# Altium PCB STM_System_Board.PCBDOC (part 12 of 16)
Units mm, origin at the board's own origin, x right, y up, seen from the top; angles counter-clockwise.
Board outline 222.53 x 100.01 mm, 6 copper layers (Top Layer, Int1 (GND), Int2 (Sign), Layer 1, Layer 2, Bottom Layer), stack 1.526 mm thick; 702 components, 774 nets, 3596 pads, 1988 vias.
Unrouted connection lines stored in the file: 1.
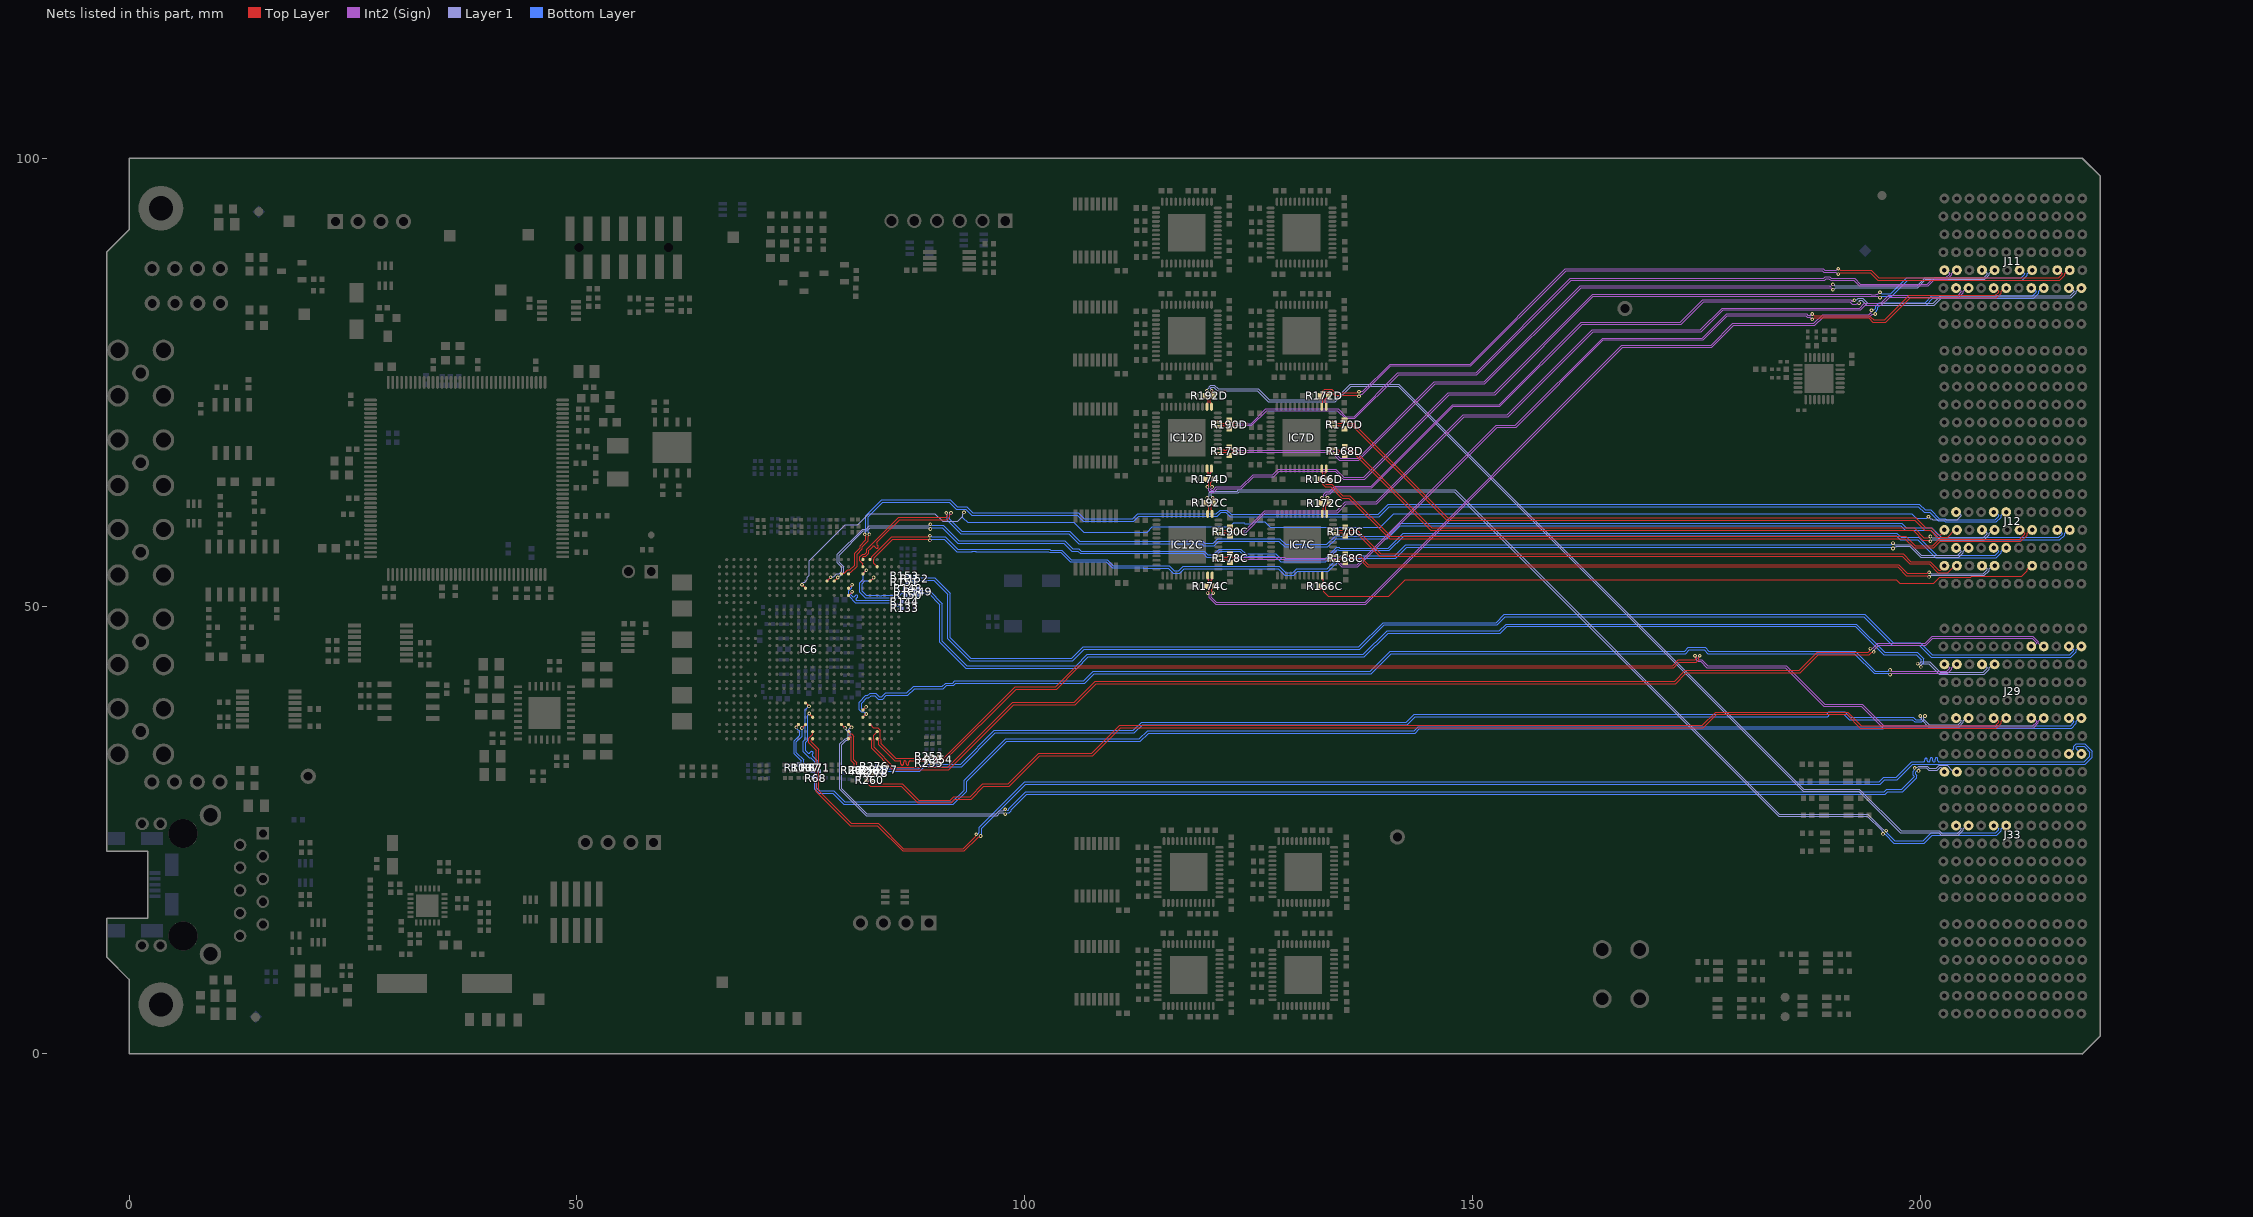
[diagram p15: the nets of this part, all layers, seen from the top]

## Via types
v1: diameter 0.4, hole 0.2, Top Layer to Bottom Layer, tented both sides, 1806 vias
v2: diameter 0.7, hole 0.4, Top Layer to Bottom Layer, tented both sides, 92 vias
v3: diameter 0.7, hole 0.4, Top Layer to Bottom Layer, 90 vias

## Nets (pads, with @x,y where several pads share a name; then routed paths per layer and width w, separated by ;. In a path a pad name is that pad's centre, name@x,y a point inside that pad or via, vN(x,y) a via of type N, cw(c..) or ccw(c..) an arc to the next point about the centre after c; other vN are vias at no path point) (continued)
SLOT3.LVDS_8_P: IC7C.47 J12.E2 R166C.1 | length 83.3
  Top Layer w0.095: IC7C.47@133.194,53.396 133.194,53.055 133.311,52.938 133.311,52.658 133.335,52.634 133.335,52.499 133.279,52.444 133.241,52.444 132.998,52.201 R166C.1@132.998,52.181 132.998,52.161 133.241,51.919 133.279,51.919 133.335,51.863 133.335,51.618 133.844,51.108 140.611,51.108 142.452,52.95 197.273,52.95 197.676,52.547 201.432,52.547 202.111,53.225 205.602,53.225 205.711,53.333 211.284,53.333 211.872,53.921 211.872,54.111 212.252,54.49 J12.E2@212.439,54.49
SLOT3.LVDS_9_N: IC7C.4 J12.I2 R168C.2 | length 75.3
  Top Layer w0.095: IC7C.4@134.394,55.596 134.735,55.596 134.852,55.48 135.091,55.48 135.095,55.484 135.428,55.484 135.483,55.54 135.483,55.578 135.726,55.821 R168C.2@135.746,55.821 135.766,55.821 136.008,55.578 136.008,55.54 136.064,55.484 137.476,55.484 138.336,54.625 197.525,54.625 198.499,53.651 200.73,53.651 200.861,53.782 v1(200.939,53.782)
  Layer 1 w0.102: v1(200.939,53.782) 200.991,53.782 201.147,53.625 207.003,53.625 207.432,54.054 207.432,54.138 207.08,54.49 J12.I2@206.839,54.49
SLOT3.LVDS_9_P: IC7C.3 J12.H2 R168C.1 | length 75.6
  Top Layer w0.095: IC7C.3@134.394,55.096 134.735,55.096 134.852,55.213 135.201,55.213 135.206,55.217 135.428,55.217 135.483,55.162 135.483,55.123 135.726,54.881 R168C.1@135.746,54.881 135.766,54.881 136.008,55.123 136.008,55.162 136.064,55.217 137.366,55.217 138.225,54.358 197.414,54.358 198.388,53.385 200.73,53.385 200.861,53.255 v1(200.939,53.255)
  Layer 1 w0.102: v1(200.939,53.255) 200.991,53.255 201.147,53.411 207.092,53.411 207.646,53.965 207.646,54.138 207.998,54.49 J12.H2@208.239,54.49
SLOT3.LVDS_10_N: IC7C.10 J12.L2 R170C.2 | length 70.8
  Top Layer w0.095: IC7C.10@134.394,58.596 134.735,58.596 134.852,58.48 135.097,58.48 135.129,58.447 135.423,58.447 135.478,58.503 135.478,58.542 135.721,58.784 R170C.2@135.741,58.784 135.761,58.784 136.003,58.542 136.003,58.503 136.059,58.447 137.105,58.447 139.727,55.825 198.025,55.825 198.883,54.967 201.048,54.967 202.035,53.981 202.248,53.981 202.639,54.372 J12.L2@202.639,54.49
SLOT3.LVDS_10_P: IC7C.9 J12.K2 R170C.1 | length 72.2
  Top Layer w0.095: IC7C.9@134.394,58.096 134.735,58.096 134.852,58.213 134.986,58.213 135.019,58.181 135.423,58.181 135.478,58.125 135.478,58.087 135.721,57.844 R170C.1@135.741,57.844 135.761,57.844 136.003,58.087 136.003,58.125 136.059,58.181 136.994,58.181 139.617,55.558 197.914,55.558 198.773,54.7 200.938,54.7 201.924,53.714 203.03,53.714 203.806,54.49 J12.K2@204.039,54.49
SLOT3.LVDS_11_N: IC7C.14 J11.B3 R172C.2 | length 97.1
  Top Layer w0.095: v1(133.157,62.084) 133.157,61.655 R172C.2@133,61.499 133,61.479 133.243,61.236 133.281,61.236 133.337,61.18 133.337,61.026 133.311,60.999 133.311,60.754 133.194,60.638 IC7C.14@133.194,60.296
  Int2 (Sign) w0.102: v1@133.157,62.085 133.363,62.291 133.363,62.464 133.651,62.752 133.976,62.752 134.613,63.389 138.639,63.389 147.739,72.489 152.939,72.489 162.114,81.664 173.164,81.664 175.673,84.173 192.166,84.173 192.307,84.032 192.428,84.032 192.519,84.123 v1(192.6,84.123)
  Layer 1 w0.102: v1(192.6,84.123) 192.655,84.179 192.84,84.179 193.034,84.373 193.505,84.373 194.081,83.797 201.397,83.797 202.239,84.639 216.717,84.639 217.132,85.054 217.132,85.138 216.78,85.49 J11.B3@216.539,85.49
SLOT3.LVDS_11_P: IC7C.13 J11.A3 R172C.1 | length 97.4
  Top Layer w0.095: IC7C.13@133.694,60.296 133.694,60.652 133.577,60.768 133.577,60.889 133.604,60.915 133.604,61.18 133.659,61.236 133.698,61.236 133.94,61.479 R172C.1@133.94,61.499 133.784,61.655 v1(133.784,62.084)
  Int2 (Sign) w0.102: v1@133.784,62.085 133.577,62.291 133.577,62.376 133.74,62.538 134.065,62.538 134.702,63.175 138.728,63.175 147.828,72.275 153.028,72.275 162.203,81.45 173.253,81.45 175.761,83.959 192.078,83.959 192.364,83.673 192.787,83.673 192.876,83.762 193.061,83.762 v1(193.116,83.817)
  Layer 1 w0.102: v1(193.116,83.817) 193.129,83.83 193.129,84.099 193.189,84.159 193.417,84.159 193.992,83.583 201.486,83.583 202.328,84.425 216.806,84.425 217.346,84.965 217.346,85.138 217.698,85.49 J11.A3@217.939,85.49
SLOT3.LVDS_12_N: IC12C.48 J11.E3 R174C.2 | length 110.7
  Top Layer w0.095: IC12C.48@120.894,53.396 120.894,53.055 120.777,52.938 120.777,52.808 120.837,52.748 120.837,52.503 120.893,52.448 120.932,52.448 121.174,52.205 R174C.2@121.174,52.185 121.174,52.165 120.932,51.923 120.893,51.923 120.837,51.867 120.837,51.654 121.018,51.474 v1(121.018,51.446)
  Int2 (Sign) w0.102: v1(121.018,51.446) 120.811,51.239 120.811,50.989 121.375,50.425 137.975,50.425 166.639,79.089 176.589,79.089 179.039,81.539 188.076,81.539 189.063,82.525 193.972,82.525 193.998,82.499 194.187,82.499 194.379,82.692 194.415,82.692 194.474,82.751 194.474,82.998 v1(194.501,83.024)
  Bottom Layer w0.095: v1(194.501,83.024) 194.524,83.047 194.78,83.047 194.96,83.228 194.96,83.483 195.343,83.867 200.492,83.867 201.242,84.617 212.49,84.617 212.905,85.032 212.905,85.111 212.526,85.49 J11.E3@212.339,85.49
SLOT3.LVDS_12_P: IC12C.47 J11.D3 R174C.1 | length 111.5
  Top Layer w0.095: v1(120.391,51.446) 120.391,51.474 120.571,51.654 120.571,51.867 120.515,51.923 120.477,51.923 120.234,52.165 R174C.1@120.234,52.185 120.234,52.205 120.477,52.448 120.515,52.448 120.571,52.503 120.571,52.638 120.511,52.698 120.511,52.938 120.394,53.055 IC12C.47@120.394,53.396
  Int2 (Sign) w0.102: v1(120.391,51.446) 120.597,51.239 120.597,50.9 121.286,50.211 138.064,50.211 166.728,78.875 176.678,78.875 179.128,81.325 188.165,81.325 189.151,82.311 193.883,82.311 193.909,82.285 194.275,82.285 194.468,82.478 194.503,82.478 194.583,82.558 194.883,82.558 v1(194.925,82.6)
  Bottom Layer w0.095: v1(194.925,82.6) 194.964,82.639 194.964,82.855 195.227,83.117 195.227,83.373 195.454,83.6 200.602,83.6 201.352,84.35 212.601,84.35 213.172,84.921 213.172,85.111 213.552,85.49 J11.D3@213.739,85.49
SLOT3.LVDS_13_N: IC12C.4 J11.H3 R178C.2 | length 102.1
  Top Layer w0.095: IC12C.4@121.594,55.596 121.935,55.596 122.052,55.48 122.297,55.48 122.317,55.459 122.579,55.459 122.635,55.515 122.635,55.554 122.877,55.796 R178C.2@122.897,55.796 122.917,55.796 123.16,55.554 123.16,55.515 123.216,55.459 123.401,55.459 123.581,55.64 v1(123.609,55.64) ; v1(187.9,82.6) 187.933,82.6 188.114,82.419 194.281,82.419 194.437,82.263 194.75,81.95 195.975,81.95 198.692,84.667 208.34,84.667 208.705,85.032 208.705,85.111 208.326,85.49 J11.H3@208.139,85.49
  Int2 (Sign) w0.102: v1(123.609,55.64) 123.817,55.433 128.983,55.433 129.063,55.352 134.725,55.352 135.453,54.625 137.075,54.625 152.614,70.164 154.739,70.164 164.489,79.914 175.639,79.914 178.325,82.6 187.261,82.6 187.41,82.451 187.579,82.451 187.604,82.426 187.688,82.426 187.862,82.6 v1(187.9,82.6)
SLOT3.LVDS_13_P: IC12C.3 J11.G3 R178C.1 | length 102.5
  Top Layer w0.095: IC12C.3@121.594,55.096 121.935,55.096 122.052,55.213 122.186,55.213 122.207,55.193 122.579,55.193 122.635,55.137 122.635,55.099 122.877,54.856 R178C.1@122.897,54.856 122.917,54.856 123.16,55.099 123.16,55.137 123.216,55.193 123.401,55.193 123.581,55.013 v1(123.609,55.013) ; v1(187.9,82) 187.956,82 188.108,82.153 194.17,82.153 194.639,81.683 196.086,81.683 198.802,84.4 208.451,84.4 208.972,84.921 208.972,85.111 209.352,85.49 J11.G3@209.539,85.49
  Int2 (Sign) w0.102: v1(123.609,55.013) 123.817,55.219 128.894,55.219 128.975,55.138 134.637,55.138 135.364,54.411 137.164,54.411 152.703,69.95 154.828,69.95 164.578,79.7 175.728,79.7 178.414,82.386 187.173,82.386 187.322,82.237 187.49,82.237 187.515,82.212 187.629,82.212 187.84,82 v1(187.9,82)
SLOT3.LVDS_14_N: IC12C.10 J11.K3 R190C.2 | length 95.3
  Top Layer w0.095: IC12C.10@121.594,58.596 121.935,58.596 122.052,58.48 122.297,58.48 122.33,58.447 122.579,58.447 122.634,58.503 122.634,58.541 122.877,58.784 R190C.2@122.897,58.784 122.917,58.784 123.159,58.541 123.159,58.503 123.215,58.447 123.481,58.447 123.661,58.627 v1(123.689,58.627)
  Int2 (Sign) w0.102: v1@123.69,58.627 123.897,58.42 124.545,58.42 126.764,60.639 134.814,60.639 135.788,61.613 139.21,61.613 148.936,71.339 153.864,71.339 163.339,80.814 175.414,80.814 177.866,83.266 193.202,83.266 193.711,83.775 195.522,83.775 196.436,84.689 204.167,84.689 204.532,85.054 204.532,85.138 204.18,85.49 J11.K3@203.939,85.49
SLOT3.LVDS_14_P: IC12C.9 J11.J3 R190C.1 | length 95.7
  Top Layer w0.095: IC12C.9@121.594,58.096 121.935,58.096 122.052,58.213 122.186,58.213 122.219,58.18 122.579,58.18 122.634,58.124 122.634,58.086 122.877,57.844 R190C.1@122.897,57.844 122.917,57.844 123.159,58.086 123.159,58.124 123.215,58.18 123.481,58.18 123.661,58 v1(123.689,58)
  Int2 (Sign) w0.102: v1@123.69,58 123.897,58.207 124.634,58.207 126.853,60.425 134.903,60.425 135.876,61.399 139.299,61.399 149.025,71.125 153.953,71.125 163.428,80.6 175.503,80.6 177.954,83.052 193.29,83.052 193.8,83.561 195.611,83.561 196.525,84.475 204.256,84.475 204.746,84.965 204.746,85.138 205.098,85.49 J11.J3@205.339,85.49
SLOT3.LVDS_15_N: IC12C.14 J33.H5 R192C.2 | length 108.7
  Top Layer w0.095: v1(120.334,62.084) 120.334,61.677 R192C.2@120.177,61.521 120.177,61.501 120.42,61.258 120.458,61.258 120.514,61.203 120.514,61.003 120.511,60.999 120.511,60.754 120.394,60.638 IC12C.14@120.394,60.296
  Layer 1 w0.102: v1(120.334,62.084) 120.334,62.094 120.571,62.331 120.571,62.654 120.756,62.839 123.711,62.839 123.836,62.964 148.039,62.964 184.228,26.775 194.103,26.775 195.606,25.271 195.904,24.974 196.125,24.974 v1(196.162,24.937)
  Bottom Layer w0.095: v1(196.162,24.937) 196.217,24.882 196.217,24.698 197.115,23.8 200.3,23.8 201.175,24.675 201.343,24.675 201.359,24.692 201.955,24.692 201.971,24.675 208.348,24.675 208.705,25.032 208.705,25.111 208.326,25.49 J33.H5@208.139,25.49
SLOT3.LVDS_15_P: IC12C.13 J33.G5 R192C.1 | length 108.8
  Top Layer w0.095: IC12C.13@120.894,60.296 120.894,60.638 120.777,60.754 120.777,60.889 120.781,60.892 120.781,61.203 120.836,61.258 120.875,61.258 121.117,61.501 R192C.1@121.117,61.521 120.961,61.677 v1(120.961,62.084)
  Layer 1 w0.102: v1(120.961,62.084) 120.961,62.116 120.785,62.293 120.785,62.565 120.844,62.625 123.8,62.625 123.925,62.75 147.95,62.75 184.139,26.561 194.014,26.561 195.518,25.057 195.752,24.823 195.752,24.601 v1(195.789,24.564)
  Bottom Layer w0.095: v1(195.789,24.564) 195.844,24.509 196.028,24.509 197.004,23.533 200.411,23.533 201.286,24.408 201.453,24.408 201.47,24.425 201.844,24.425 201.861,24.408 208.459,24.408 208.972,24.921 208.972,25.111 209.352,25.49 J33.G5@209.539,25.49
SLOT3.LVDSr0_N: IC6.P24 R107.1 | length 5.4
  Top Layer w0.095: v1(75.115,36.384) IC6.P24@75.515,36.784
  Bottom Layer w0.095: v1(75.115,36.384) 75.144,36.355 75.144,35.478 74.495,34.83 74.495,33.645 75.291,32.85 75.291,32.495 75.346,32.44 75.352,32.44 75.514,32.277 R107.1@75.514,32.257
SLOT3.LVDSr0_P: IC6.R24 R103.1 | length 5.4
  Top Layer w0.095: v1(74.499,36.454) 74.499,36.511 IC6.R24@74.715,36.727
  Bottom Layer w0.095: v1(74.499,36.454) 74.499,36.372 74.877,35.994 74.877,35.589 74.229,34.94 74.229,33.535 75.024,32.74 75.024,32.521 74.968,32.465 74.94,32.465 74.778,32.302 R103.1@74.778,32.282
SLOT3.LVDSr1_N: IC6.H26 R26.1 | length 4.2
  Top Layer w0.095: IC6.H26@80.315,35.184 80.315,35.253 80.408,35.346 80.408,35.395 80.464,35.451 80.543,35.451 80.632,35.361 80.632,32.718 80.943,32.407 80.943,32.228 80.888,32.172 80.833,32.172 80.67,32.01 R26.1@80.67,31.99
SLOT3.LVDSr1_P: IC6.H25 R22.1 | length 4.6
  Top Layer w0.095: IC6.H25@80.315,35.984 80.315,35.915 80.408,35.822 80.408,35.773 80.464,35.717 80.653,35.717 80.899,35.471 80.899,33.895 80.899,32.828 81.21,32.517 81.21,32.228 81.266,32.172 81.321,32.172 81.483,32.01 R22.1@81.483,31.99
SLOT3.LVDSr3_N: IC6.H6 R144.1 | length 7.8
  Top Layer w0.095: IC6.H6@80.315,51.184 v1(80.715,51.584)
  Bottom Layer w0.095: v1(80.715,51.584) 80.715,51.51 80.581,51.376 80.581,51.242 80.624,51.199 80.657,51.165 80.767,51.056 ccw(c80.871,51.16) 80.975,51.056 81.1,51.181 cw(c81.204,51.076) 81.308,51.181 cw(c81.204,51.076) 81.308,50.972 81.184,50.848 ccw(c81.288,50.743) 81.184,50.639 81.198,50.625 81.55,50.625 85.002,50.625 85.384,50.243 86.003,50.243 86.058,50.299 86.058,50.329 86.221,50.492 R144.1@86.241,50.492
SLOT3.LVDSr3_P: IC6.H5 R133.1 | length 8.5
  Top Layer w0.095: IC6.H5@80.315,51.984 v1(80.715,52.384)
  Bottom Layer w0.095: v1(80.715,52.384) 80.657,52.326 80.657,52.055 80.314,51.713 80.314,51.131 81.087,50.358 84.892,50.358 85.274,49.976 86,49.976 86.056,49.92 86.056,49.888 86.219,49.725 R133.1@86.239,49.725
SLOT4.LVDS_0_N: J29.B3 R68.1 R71.2 | length 148.3
  Bottom Layer w0.095: R68.1@76.991,30.803 R68.1@76.971,30.803 ; R71.2@77.056,31.602 77.056,31.582 76.894,31.419 76.862,31.419 76.794,31.351 76.794,31.021 76.808,31.007 76.808,30.965 R68.1@76.971,30.803 ; J29.B3@216.539,37.49 216.726,37.49 217.105,37.111 217.105,37.032 216.723,36.65 195.828,36.65 195.72,36.542 143.889,36.542 143.439,36.092 113.714,36.092 112.789,35.167 97.839,35.167 93.225,30.552 93.225,29.45 91.917,28.142 79.883,28.142 78.65,29.375 77.1,29.375 76.794,29.681 76.794,30.585 76.808,30.599 76.808,30.64 R68.1@76.971,30.803
SLOT4.LVDS_0_P: J29.A3 R67.2 R68.2 | length 149.2
  Bottom Layer w0.095: R67.2@76.289,31.602 76.289,31.582 76.452,31.419 76.472,31.419 76.527,31.363 76.527,31.021 76.513,31.007 76.513,30.965 R68.2@76.351,30.803 ; R68.2@76.331,30.803 R68.2@76.351,30.803 ; J29.A3@217.939,37.49 217.752,37.49 217.372,37.111 217.372,36.921 216.834,36.383 195.938,36.383 195.83,36.275 144,36.275 143.55,35.825 113.825,35.825 112.9,34.9 97.95,34.9 93.492,30.442 93.492,29.339 92.027,27.875 79.773,27.875 78.539,29.108 76.99,29.108 76.527,29.571 76.527,30.585 76.513,30.599 76.513,30.64 R68.2@76.351,30.803
SLOT4.LVDS_1_N: J29.E3 R254.1 R255.2 | length 133.3
  Top Layer w0.095: R255.2@89.628,32.461 89.648,32.461 89.811,32.624 89.811,32.658 89.866,32.714 90.153,32.714 90.171,32.695 90.213,32.695 R254.1@90.375,32.533 ; R254.1@90.375,32.513 R254.1@90.375,32.533 ; v1(175.325,44.45) 175.325,44.372 175.195,44.242 175.195,43.997 174.931,43.733 173.058,43.733 172.408,43.083 105.908,43.083 103.533,40.708 99.008,40.708 91.009,32.709 90.593,32.709 90.579,32.695 90.538,32.695 R254.1@90.375,32.533
  Int2 (Sign) w0.102: v1(175.325,44.45) 175.325,44.398 175.168,44.241 175.168,44.108 175.246,44.03 175.547,44.03 176.227,43.35 184.975,43.35 189.275,39.05 193.45,39.05 195.85,36.65 212.528,36.65 212.932,37.054 212.932,37.138 212.58,37.49 J29.E3@212.339,37.49
SLOT4.LVDS_1_P: J29.D3 R253.2 R254.2 | length 133.6
  Top Layer w0.095: R253.2@89.628,33.233 89.648,33.233 89.811,33.07 89.811,33.036 89.866,32.98 90.157,32.98 90.167,32.99 90.213,32.99 R254.2@90.375,33.153 ; R254.2@90.375,33.173 R254.2@90.375,33.153 ; v1(174.798,44.45) 174.798,44.372 174.928,44.242 174.928,44.107 174.821,44 172.948,44 172.298,43.35 105.798,43.35 103.423,40.975 98.898,40.975 90.899,32.976 90.593,32.976 90.579,32.99 90.538,32.99 R254.2@90.375,33.153
  Int2 (Sign) w0.102: v1(174.798,44.45) 174.798,44.398 174.955,44.241 174.955,44.02 175.158,43.816 175.459,43.816 176.139,43.136 184.886,43.136 189.186,38.836 193.361,38.836 195.761,36.436 212.617,36.436 213.146,36.965 213.146,37.138 213.498,37.49 J29.D3@213.739,37.49
SLOT4.LVDS_2_N: IC6.J24 J33.L8 | length 136.1
  Top Layer w0.095: IC6.J24@79.515,36.784 79.528,36.784 79.912,36.4 v1(79.925,36.4)
  Layer 1 w0.102: v1(79.925,36.4) 79.925,36.319 80.126,36.118 80.126,36.06 80.293,35.893 80.293,35.428 80.071,35.206 79.961,35.206 79.361,34.606 79.361,29.536 82.286,26.611 96.889,26.611 97.214,26.936 97.591,26.936 97.748,26.78 v1(97.8,26.78) ; v1(199.75,31.598) 199.782,31.63 199.782,31.861 199.841,31.921 200.627,31.921 200.886,31.661 201.817,31.661 202.159,32.004 202.244,32.004 202.639,31.609 J33.L8@202.639,31.49
  Bottom Layer w0.095: v1(97.8,26.78) 97.878,26.78 98.008,26.91 98.253,26.91 98.465,27.122 98.465,27.263 100.186,28.983 196.033,28.983 196.333,29.283 198.011,29.283 199.538,30.811 199.538,31.111 199.417,31.232 199.417,31.447 199.512,31.542 199.694,31.542 v1(199.75,31.598)
SLOT4.LVDS_2_P: IC6.H24 J33.K8 | length 137.2
  Top Layer w0.095: IC6.H24@80.315,36.784 v1(80.649,36.45)
  Layer 1 w0.102: v1(80.649,36.45) 80.568,36.45 80.419,36.3 80.416,36.3 80.344,36.228 80.344,36.144 80.507,35.982 80.507,35.339 80.16,34.992 80.05,34.992 79.575,34.517 79.575,29.625 82.375,26.825 96.8,26.825 97.125,27.15 97.591,27.15 97.748,27.307 v1(97.8,27.307) ; v1(199.339,31.928) 199.39,31.979 199.597,31.979 199.753,32.135 200.715,32.135 200.975,31.875 201.728,31.875 202.071,32.218 202.94,32.218 203.477,31.681 203.848,31.681 J33.K8@204.039,31.49
  Bottom Layer w0.095: v1(97.8,27.307) 97.878,27.307 98.008,27.176 98.143,27.176 98.198,27.232 98.198,27.373 100.075,29.25 195.923,29.25 196.223,29.55 197.9,29.55 199.271,30.921 199.271,31 199.15,31.121 199.15,31.557 199.283,31.69 199.283,31.872 v1(199.339,31.928)
SLOT4.LVDS_3_N: J29.I6 R149.1 R150.2 | length 132.6
  Layer 1 w0.102: v1(199.651,43.574) 199.699,43.526 199.824,43.526 200.061,43.764 201.011,43.764 202.175,42.6 206.978,42.6 207.432,43.054 207.432,43.138 207.08,43.49 J29.I6@206.839,43.49
  Bottom Layer w0.095: R150.2@87.308,51.186 87.328,51.186 87.491,51.348 87.491,51.385 87.547,51.44 87.787,51.44 87.805,51.458 87.884,51.458 87.895,51.447 87.94,51.447 R149.1@88.102,51.285 ; R149.1@88.102,51.265 R149.1@88.102,51.285 ; v1(199.651,43.574) 199.706,43.63 199.89,43.63 200.05,43.79 200.05,44 199.5,44.55 195.873,44.55 192.698,47.725 153.85,47.725 153.083,46.958 140.533,46.958 137.9,44.325 107.075,44.325 105.825,43.075 93.373,43.075 90.508,45.939 90.508,50.167 89.2,51.475 88.65,51.475 88.636,51.461 88.32,51.461 88.306,51.447 88.265,51.447 R149.1@88.102,51.285
SLOT4.LVDS_3_P: J29.H6 R148.2 R149.2 | length 133.4
  Layer 1 w0.102: v1(200.023,43.202) 199.975,43.25 199.975,43.375 200.15,43.55 200.922,43.55 202.086,42.386 207.067,42.386 207.646,42.965 207.646,43.138 207.998,43.49 J29.H6@208.239,43.49
  Bottom Layer w0.095: R148.2@87.304,51.96 87.324,51.96 87.487,51.797 87.487,51.763 87.543,51.707 87.677,51.707 87.695,51.725 87.881,51.725 87.898,51.742 87.94,51.742 R149.2@88.102,51.905 ; R149.2@88.102,51.925 R149.2@88.102,51.905 ; v1(200.023,43.202) 200.078,43.257 200.078,43.441 200.317,43.679 200.317,44.111 199.611,44.817 195.983,44.817 192.808,47.992 153.739,47.992 152.973,47.225 140.423,47.225 137.789,44.592 106.964,44.592 105.714,43.342 93.483,43.342 90.775,46.05 90.775,50.277 89.311,51.742 88.54,51.742 88.526,51.728 88.32,51.728 88.306,51.742 88.265,51.742 R149.2@88.102,51.905
SLOT4.LVDS_4_N: IC6.F23 J29.L6 | length 129.1
  Top Layer w0.095: IC6.F23@81.915,37.584 v1(82.281,37.95)
  Int2 (Sign) w0.102: v1(196.575,42.875) 196.634,42.875 196.784,42.725 202.903,42.725 203.232,43.054 203.232,43.138 202.88,43.49 J29.L6@202.639,43.49
  Bottom Layer w0.095: v1(82.281,37.95) 82.278,37.95 82.014,38.214 81.739,38.214 81.508,38.445 81.508,39.286 82.248,40.026 82.48,40.026 82.721,40.267 83.361,40.267 83.764,39.864 84.014,39.864 84.442,40.292 86.839,40.292 87.573,41.025 90.801,41.025 91.174,41.398 91.922,41.398 92.166,41.642 106.564,41.642 107.648,42.725 138.548,42.725 140.789,44.967 173.653,44.967 174.062,45.375 175.952,45.375 176.361,44.967 192.683,44.967 194.905,42.745 196.367,42.745 196.497,42.875 v1(196.575,42.875)
SLOT4.LVDS_4_P: IC6.F22 J29.K6 | length 128.5
  Top Layer w0.095: IC6.F22@81.915,38.384 v1(82.275,38.744)
  Int2 (Sign) w0.102: v1(196.575,42.348) 196.627,42.348 196.627,42.355 196.784,42.511 202.992,42.511 203.446,42.965 203.446,43.138 203.798,43.49 J29.K6@204.039,43.49
  Bottom Layer w0.095: v1(82.275,38.744) 82.275,38.741 82.014,38.48 81.85,38.48 81.775,38.555 81.775,39.175 82.359,39.759 82.591,39.759 82.832,40 83.25,40 83.653,39.597 84.124,39.597 84.552,40.025 86.95,40.025 87.684,40.759 90.912,40.759 91.285,41.132 92.033,41.132 92.276,41.375 106.675,41.375 107.758,42.458 138.658,42.458 140.9,44.7 173.764,44.7 174.172,45.108 175.842,45.108 176.25,44.7 192.573,44.7 194.795,42.478 196.367,42.478 196.497,42.348 v1(196.575,42.348)
SLOT4.LVDS_5_N: IC6.L4 J12.H3 | length 140.6
  Top Layer w0.095: IC6.L4@77.915,52.809 v1(78.315,53.209)
  Layer 1 w0.102: v1(78.315,53.209) 78.372,53.266 78.663,53.266 79.003,53.606 79.304,53.606 79.561,53.864 79.561,54.301 79.05,54.812 79.05,55.764 81.878,58.592 82.278,58.592 82.653,58.967 86.071,58.967 86.072,58.965 89.241,58.965 89.398,59.122 v1(89.45,59.122)
  Bottom Layer w0.095: v1(89.45,59.122) 89.47,59.122 89.6,58.992 90.91,58.992 92.611,57.292 104.461,57.292 105.352,56.4 106.027,56.4 106.286,56.142 119.787,56.142 120.008,56.142 120.428,55.722 121.045,55.722 121.677,56.354 124.121,56.354 124.633,55.842 128.008,55.842 128.65,55.2 133.448,55.2 134.785,56.537 135.085,56.537 135.155,56.467 140.565,56.467 142.223,58.125 197.35,58.125 197.808,57.667 199.783,57.667 201.8,55.65 208.323,55.65 208.705,56.032 208.705,56.111 208.326,56.49 J12.H3@208.139,56.49
SLOT4.LVDS_5_P: IC6.K4 J12.G3 | length 140.2
  Top Layer w0.095: IC6.K4@78.715,52.784 v1(79.115,53.184)
  Layer 1 w0.102: v1(79.115,53.184) 79.115,53.186 79.321,53.392 79.392,53.392 79.775,53.775 79.775,54.389 79.264,54.901 79.264,55.675 81.967,58.378 82.367,58.378 82.742,58.753 85.982,58.753 85.984,58.751 89.241,58.751 89.398,58.595 v1(89.45,58.595)
  Bottom Layer w0.095: v1(89.45,58.595) 89.47,58.595 89.6,58.725 90.8,58.725 92.5,57.025 104.35,57.025 105.242,56.133 105.917,56.133 106.175,55.875 119.898,55.875 120.318,55.455 121.155,55.455 121.787,56.087 124.011,56.087 124.523,55.575 127.898,55.575 128.54,54.933 133.558,54.933 134.896,56.271 134.974,56.271 135.044,56.201 140.676,56.201 142.333,57.858 197.24,57.858 197.698,57.4 199.673,57.4 201.69,55.383 208.434,55.383 208.972,55.921 208.972,56.111 209.352,56.49 J12.G3@209.539,56.49
SLOT4.LVDS_6_N: IC6.E1 J12.K3 | length 128.1
  Top Layer w0.095: IC6.E1@82.715,55.184 82.899,55.367 82.899,55.486 83.679,56.266 85.135,57.722 89.192,57.722 89.322,57.852 v1(89.4,57.852)
  Layer 1 w0.102: v1(196.9,57.02) 196.938,57.02 197.112,56.846 197.196,56.846 197.214,56.864 198.861,56.864 200.075,55.65 204.128,55.65 204.532,56.054 204.532,56.138 204.18,56.49 J12.K3@203.939,56.49
  Bottom Layer w0.095: v1(89.4,57.852) 89.478,57.852 89.608,57.722 91.103,57.722 92.122,56.703 92.483,56.342 94.007,56.342 94.029,56.364 94.62,56.364 94.642,56.342 102.794,56.342 102.885,56.25 104.127,56.25 105.186,55.192 109.183,55.192 109.858,54.517 113.313,54.517 113.324,54.506 116.094,54.506 116.653,53.947 117.194,53.947 117.664,54.417 128.408,54.417 129.1,53.725 129.923,53.725 130.348,54.15 133.773,54.15 135.24,55.617 141.29,55.617 142.527,56.854 196.251,56.854 196.265,56.84 196.686,56.84 196.867,57.02 v1(196.9,57.02)
SLOT4.LVDS_6_P: IC6.D2 J12.J3 | length 128.9
  Top Layer w0.095: IC6.D2@83.515,54.384 83.127,54.772 83.127,55.218 83.165,55.257 83.165,55.375 83.789,55.999 85.246,57.455 89.192,57.455 89.322,57.325 v1(89.4,57.325)
  Layer 1 w0.102: v1(196.9,56.42) 196.96,56.42 197.171,56.632 197.285,56.632 197.302,56.65 198.772,56.65 199.986,55.436 204.217,55.436 204.746,55.965 204.746,56.138 205.098,56.49 J12.J3@205.339,56.49
  Bottom Layer w0.095: v1(89.4,57.325) 89.478,57.325 89.608,57.455 90.993,57.455 92.011,56.436 92.373,56.075 94.117,56.075 94.139,56.097 94.51,56.097 94.532,56.075 102.683,56.075 102.774,55.984 104.016,55.984 105.075,54.925 109.073,54.925 109.748,54.25 113.203,54.25 113.213,54.239 115.983,54.239 116.543,53.68 117.305,53.68 117.775,54.15 128.298,54.15 128.989,53.458 130.033,53.458 130.458,53.883 133.883,53.883 135.35,55.35 141.4,55.35 142.637,56.587 196.14,56.587 196.154,56.573 196.692,56.573 196.844,56.42 v1(196.9,56.42)
SLOT4.LVDS_7_N: IC6.F1 J12.C4 | length 142.4
  Top Layer w0.095: IC6.F1@81.915,55.184 81.913,55.186 81.913,55.445 82.002,55.534 82.209,55.534 82.588,55.913 82.588,56.21 82.714,56.336 82.994,56.617 cw(c83.117,56.493) 83.241,56.617 83.355,56.503 ccw(c83.478,56.626) 83.602,56.503 ccw(c83.478,56.626) 83.602,56.749 83.488,56.864 cw(c83.611,56.987) 83.488,57.11 83.864,57.486 86.011,59.633 91.311,59.633 91.625,59.947 91.625,60.192 91.755,60.322 v1(91.755,60.4)
  Bottom Layer w0.095: v1(91.755,60.4) 91.7,60.4 91.625,60.325 91.625,59.675 92.958,58.342 105.011,58.342 106.119,57.234 119.841,57.234 120.061,57.014 121.011,57.014 121.514,57.517 128.458,57.517 129.1,56.875 133.723,56.875 134.639,57.792 140.339,57.792 141.773,59.225 197.875,59.225 198.383,58.717 201.208,58.717 202.275,57.65 215.423,57.65 215.805,58.032 215.805,58.111 215.426,58.49 J12.C4@215.239,58.49
SLOT4.LVDS_7_P: IC6.F2 J12.B4 | length 143.5
  Top Layer w0.095: IC6.F2@81.915,54.384 81.903,54.396 81.903,54.702 81.565,55.039 81.565,55.474 81.892,55.8 82.098,55.8 82.321,56.023 82.321,56.321 85.9,59.9 91.201,59.9 91.358,60.057 91.358,60.192 91.228,60.322 v1(91.228,60.4)
  Bottom Layer w0.095: v1(91.228,60.4) 91.283,60.4 91.358,60.325 91.358,59.564 92.848,58.075 104.9,58.075 106.008,56.967 112.404,56.967 119.731,56.967 119.951,56.747 121.122,56.747 121.625,57.25 128.348,57.25 128.99,56.608 133.833,56.608 134.75,57.525 140.45,57.525 141.883,58.958 197.765,58.958 198.273,58.45 201.098,58.45 202.165,57.383 215.534,57.383 216.072,57.921 216.072,58.111 216.452,58.49 J12.B4@216.639,58.49
SLOT4.LVDS_8_N: IC7D.48 J12.F4 R166D.2 | length 84.3
  Top Layer w0.095: IC7D.48@133.629,65.344 133.629,65.003 133.512,64.886 133.512,64.716 133.536,64.692 133.536,64.447 133.592,64.392 133.631,64.392 133.873,64.149 R166D.2@133.873,64.129 133.873,64.109 133.631,63.867 133.592,63.867 133.536,63.811 133.536,63.677 133.631,63.582 134.232,63.582 135.489,62.325 136.275,62.325 140.825,57.775 198.35,57.775 199.375,56.75 201.348,56.75 202.079,57.481 211.055,57.481 211.605,58.032 211.605,58.111 211.226,58.49 J12.F4@211.039,58.49
SLOT4.LVDS_8_P: IC7D.47 J12.E4 R166D.1 | length 85.2
  Top Layer w0.095: IC7D.47@133.129,65.344 133.129,65.003 133.246,64.886 133.246,64.606 133.27,64.582 133.27,64.447 133.214,64.392 133.176,64.392 132.933,64.149 R166D.1@132.933,64.129 132.933,64.109 133.176,63.867 133.214,63.867 133.27,63.811 133.27,63.566 133.521,63.315 134.121,63.315 135.378,62.058 136.164,62.058 140.714,57.508 198.239,57.508 199.264,56.483 201.458,56.483 202.189,57.214 211.165,57.214 211.872,57.921 211.872,58.111 212.252,58.49 J12.E4@212.439,58.49
SLOT4.LVDS_9_N: IC7D.4 J12.I4 R168D.2 | length 78.5
  Top Layer w0.095: IC7D.4@134.329,67.544 134.67,67.544 134.787,67.428 135.032,67.428 135.166,67.293 135.382,67.293 135.437,67.349 R168D.2@135.437,67.526 ; R168D.2@135.681,67.769 135.701,67.769 135.943,67.526 135.943,67.488 135.999,67.432 136.686,67.432 145.393,58.725 199.25,58.725 200.349,57.626 200.867,57.626 200.997,57.757 v1(201.075,57.757)
  Layer 1 w0.102: v1(201.075,57.757) 201.127,57.757 201.284,57.6 206.978,57.6 207.432,58.054 207.432,58.138 207.08,58.49 J12.I4@206.839,58.49
SLOT4.LVDS_9_P: IC7D.3 J12.H4 R168D.1 | length 79
  Top Layer w0.095: IC7D.3@134.329,67.044 134.67,67.044 134.787,67.161 134.921,67.161 135.056,67.027 135.463,67.027 R168D.1@135.661,66.829 ; R168D.1@135.681,66.829 135.701,66.829 135.943,67.071 135.943,67.11 135.999,67.165 136.575,67.165 145.282,58.458 199.139,58.458 200.238,57.36 200.867,57.36 200.997,57.23 v1(201.075,57.23)
  Layer 1 w0.102: v1(201.075,57.23) 201.127,57.23 201.284,57.386 207.067,57.386 207.646,57.965 207.646,58.138 207.998,58.49 J12.H4@208.239,58.49
SLOT4.LVDS_10_N: IC7D.10 J12.L4 R170D.2 | length 74.1
  Top Layer w0.095: IC7D.10@134.329,70.544 134.67,70.544 134.787,70.428 135.032,70.428 135.064,70.396 135.358,70.396 135.413,70.451 135.413,70.49 135.656,70.732 R170D.2@135.676,70.732 135.696,70.732 135.938,70.49 135.938,70.451 135.994,70.396 136.632,70.396 147.177,59.85 199.425,59.85 200.558,58.717 201.161,58.717 201.907,57.97 202.258,57.97 202.639,58.351 J12.L4@202.639,58.49
SLOT4.LVDS_10_P: IC7D.9 J12.K4 R170D.1 | length 75.6
  Top Layer w0.095: IC7D.9@134.329,70.044 134.67,70.044 134.787,70.161 134.921,70.161 134.954,70.129 135.358,70.129 135.413,70.073 135.413,70.035 135.656,69.792 R170D.1@135.676,69.792 135.696,69.792 135.938,70.035 135.938,70.073 135.994,70.129 136.521,70.129 147.067,59.583 199.315,59.583 200.448,58.45 201.05,58.45 201.797,57.703 203.02,57.703 203.806,58.49 J12.K4@204.039,58.49
SLOT4.LVDS_11_N: IC7D.14 J11.C4 R172D.2 | length 92.2
  Top Layer w0.095: IC7D.14@133.129,72.244 133.129,72.586 133.246,72.703 133.246,72.947 133.272,72.974 133.272,73.128 133.216,73.184 133.178,73.184 132.935,73.427 R172D.2@132.935,73.447 132.935,73.467 133.178,73.709 133.216,73.709 133.272,73.765 133.272,74.01 133.484,74.222 134.279,74.222 134.709,73.792 136.169,73.792 136.174,73.797 137.092,73.797 137.222,73.927 v1(137.3,73.927) ; v1(190.8,87.65) 190.833,87.65 191.014,87.469 194.483,87.469 195.311,86.642 215.415,86.642 215.805,87.032 215.805,87.111 215.426,87.49 J11.C4@215.239,87.49
  Int2 (Sign) w0.102: v1(137.3,73.927) 137.326,73.953 137.703,73.953 140.764,77.014 149.689,77.014 160.314,87.639 189.123,87.639 189.286,87.476 190.588,87.476 190.762,87.65 v1(190.8,87.65)
SLOT4.LVDS_11_P: IC7D.13 J11.B4 R172D.1 | length 92.3
  Top Layer w0.095: IC7D.13@133.629,72.244 133.629,72.6 133.512,72.717 133.512,72.837 133.539,72.863 133.539,73.128 133.594,73.184 133.633,73.184 133.875,73.427 R172D.1@133.875,73.447 133.875,73.467 133.633,73.709 133.594,73.709 133.539,73.765 133.539,73.899 133.594,73.955 134.169,73.955 134.599,73.525 136.279,73.525 136.284,73.53 137.092,73.53 137.222,73.4 v1(137.3,73.4) ; v1(190.8,87.05) 190.856,87.05 191.008,87.203 194.373,87.203 195.2,86.375 215.526,86.375 216.072,86.921 216.072,87.111 216.452,87.49 J11.B4@216.639,87.49
  Int2 (Sign) w0.102: v1(137.3,73.4) 137.339,73.4 137.569,73.63 137.682,73.63 140.853,76.8 149.778,76.8 160.403,87.425 189.034,87.425 189.197,87.262 190.529,87.262 190.74,87.05 v1(190.8,87.05)
SLOT4.LVDS_12_N: IC12D.48 J11.F4 R174D.2 | length 105.5
  Top Layer w0.095: IC12D.48@120.829,65.344 120.829,65.003 120.712,64.886 120.712,64.757 120.772,64.696 120.772,64.452 120.828,64.396 120.867,64.396 121.109,64.153 R174D.2@121.109,64.133 121.109,64.113 120.867,63.871 120.828,63.871 120.772,63.815 120.772,63.508 120.903,63.378 v1(120.903,63.3)
  Int2 (Sign) w0.102: v1(120.903,63.3) 120.903,63.219 120.746,63.063 120.746,62.964 120.806,62.904 121.005,62.904 121.389,63.288 124.088,63.288 125.464,64.664 127.689,64.664 128.289,65.264 134.714,65.264 135.603,64.375 137.825,64.375 147.264,73.814 152.389,73.814 163.363,84.788 194.445,84.788 194.461,84.772 194.996,84.772 195.012,84.788 195.176,84.788 195.412,85.025 v1(195.45,85.025)
  Bottom Layer w0.095: v1(195.45,85.025) 195.483,85.025 195.664,84.844 196.644,84.844 198.425,86.625 211.198,86.625 211.605,87.032 211.605,87.111 211.226,87.49 J11.F4@211.039,87.49
SLOT4.LVDS_12_P: IC12D.47 J11.E4 R174D.1 | length 106.2
  Top Layer w0.095: IC12D.47@120.329,65.344 120.329,65.003 120.446,64.886 120.446,64.646 120.506,64.586 120.506,64.452 120.45,64.396 120.412,64.396 120.169,64.153 R174D.1@120.169,64.133 120.169,64.113 120.412,63.871 120.45,63.871 120.506,63.815 120.506,63.508 120.376,63.378 v1(120.376,63.3)
  Int2 (Sign) w0.102: v1(120.376,63.3) 120.376,63.248 120.532,63.091 120.532,62.875 120.717,62.69 121.094,62.69 121.477,63.074 124.176,63.074 125.553,64.45 127.778,64.45 128.378,65.05 134.625,65.05 135.514,64.161 137.914,64.161 147.353,73.6 152.478,73.6 163.452,84.574 194.356,84.574 194.372,84.558 195.085,84.558 195.101,84.574 195.241,84.574 195.39,84.425 v1(195.45,84.425)
  Bottom Layer w0.095: v1(195.45,84.425) 195.506,84.425 195.658,84.577 196.755,84.577 198.536,86.358 211.309,86.358 211.872,86.921 211.872,87.111 212.252,87.49 J11.E4@212.439,87.49
SLOT4.LVDS_13_N: IC12D.4 J11.I4 R178D.2 | length 96.3
  Top Layer w0.095: IC12D.4@121.529,67.544 121.87,67.544 121.987,67.428 122.232,67.428 122.252,67.408 122.514,67.408 122.57,67.463 122.57,67.502 122.812,67.744 R178D.2@122.832,67.744 122.852,67.744 123.095,67.502 123.095,67.463 123.151,67.408 123.417,67.408 123.547,67.538 v1(123.625,67.538)
  Int2 (Sign) w0.102: v1(123.625,67.538) 123.677,67.538 123.834,67.381 134.321,67.381 135.203,66.5 137.2,66.5 145.714,75.014 151.264,75.014 162.017,85.767 189.795,85.767 189.846,85.716 189.979,85.716 190.162,85.899 v1(190.2,85.899)
  Layer 1 w0.102: v1(190.2,85.899) 190.273,85.899 190.409,85.764 190.451,85.764 199.589,85.764 200.489,86.664 207.042,86.664 207.432,87.054 207.432,87.138 207.08,87.49 J11.I4@206.839,87.49
SLOT4.LVDS_13_P: IC12D.3 J11.H4 R178D.1 | length 96.7
  Top Layer w0.095: IC12D.3@121.529,67.044 121.87,67.044 121.987,67.161 122.121,67.161 122.142,67.141 122.514,67.141 122.57,67.085 122.57,67.047 122.812,66.804 R178D.1@122.832,66.804 122.852,66.804 123.095,67.047 123.095,67.085 123.151,67.141 123.417,67.141 123.547,67.011 v1(123.625,67.011)
  Int2 (Sign) w0.102: v1(123.625,67.011) 123.677,67.011 123.834,67.167 134.233,67.167 135.114,66.286 137.289,66.286 145.803,74.8 151.353,74.8 162.105,85.553 189.706,85.553 189.758,85.502 189.987,85.502 190.14,85.348 190.14,85.299 v1(190.2,85.299)
  Layer 1 w0.102: v1(190.2,85.299) 190.26,85.299 190.51,85.55 199.678,85.55 200.578,86.45 207.131,86.45 207.646,86.965 207.646,87.138 207.998,87.49 J11.H4@208.239,87.49
SLOT4.LVDS_14_N: IC12D.10 J11.L4 R190D.2 | length 91.4
  Top Layer w0.095: IC12D.10@121.529,70.544 121.87,70.544 121.987,70.428 122.232,70.428 122.265,70.395 122.514,70.395 122.569,70.451 122.569,70.489 122.812,70.732 R190D.2@122.832,70.732 122.852,70.732 123.094,70.489 123.094,70.451 123.15,70.395 123.367,70.395 123.497,70.525 v1(123.575,70.525)
  Int2 (Sign) w0.102: v1(123.575,70.525) 123.632,70.468 123.743,70.468 123.842,70.369 124.157,70.369 124.255,70.467 124.745,70.467 124.843,70.369 125.244,70.369 126.889,72.014 134.964,72.014 135.826,71.151 136.751,71.151 141.639,76.039 150.364,76.039 160.889,86.564 189.177,86.564 189.355,86.742 189.845,86.742 190.023,86.564 192.611,86.564 193.236,85.939 200.736,85.939 201.483,86.686 202.864,86.686 203.232,87.054 203.232,87.138 202.88,87.49 J11.L4@202.639,87.49
SLOT4.LVDS_14_P: IC12D.9 J11.K4 R190D.1 | length 91.8
  Top Layer w0.095: IC12D.9@121.529,70.044 121.87,70.044 121.987,70.161 122.121,70.161 122.154,70.128 122.514,70.128 122.569,70.073 122.569,70.034 122.812,69.792 R190D.1@122.832,69.792 122.852,69.792 123.094,70.034 123.094,70.073 123.15,70.128 123.367,70.128 123.497,69.998 v1(123.575,69.998)
  Int2 (Sign) w0.102: v1(123.575,69.998) 123.632,70.055 123.765,70.055 123.864,70.155 124.245,70.155 124.344,70.253 124.656,70.253 124.755,70.155 125.332,70.155 126.978,71.8 134.875,71.8 135.738,70.937 136.84,70.937 141.728,75.825 150.453,75.825 160.978,86.35 189.266,86.35 189.444,86.528 189.756,86.528 189.934,86.35 190.2,86.35 192.522,86.35 193.147,85.725 200.825,85.725 201.572,86.472 202.953,86.472 203.446,86.965 203.446,87.138 203.798,87.49 J11.K4@204.039,87.49
SLOT4.LVDS_15_N: IC12D.14 J33.K5 R192D.2 | length 109.9
  Top Layer w0.095: v1(120.319,74.025) 120.319,73.675 R192D.2@120.112,73.469 120.112,73.449 120.355,73.206 120.393,73.206 120.449,73.151 120.449,72.951 120.446,72.947 120.446,72.703 120.329,72.586 IC12D.14@120.329,72.244
  Layer 1 w0.102: v1(120.319,74.025) 120.376,74.082 120.376,74.193 120.556,74.372 120.556,74.466 120.741,74.651 121.165,74.651 121.577,74.239 126.039,74.239 127.278,73 134.575,73 136.339,74.764 141.739,74.764 186.953,29.55 193.153,29.55 197.803,24.9 202.075,24.9 202.375,24.6 204.078,24.6 204.532,25.054 204.532,25.138 204.18,25.49 J33.K5@203.939,25.49
SLOT4.LVDS_15_P: IC12D.13 J33.J5 R192D.1 | length 109.8
  Top Layer w0.095: IC12D.13@120.829,72.244 120.829,72.586 120.712,72.703 120.712,72.837 120.716,72.84 120.716,73.151 120.771,73.206 120.81,73.206 121.052,73.449 R192D.1@121.052,73.469 120.846,73.675 v1(120.846,74.025)
  Layer 1 w0.102: v1(120.846,74.025) 120.789,74.082 120.789,74.215 120.77,74.234 120.77,74.377 120.829,74.437 121.076,74.437 121.488,74.025 125.95,74.025 127.189,72.786 134.664,72.786 136.428,74.55 141.65,74.55 186.864,29.336 193.064,29.336 197.714,24.686 201.986,24.686 202.286,24.386 204.167,24.386 204.746,24.965 204.746,25.138 205.098,25.49 J33.J5@205.339,25.49
SLOT4.LVDSr0_N: IC6.N23 R71.1 | length 7.8
  Top Layer w0.095: v1@75.925,37.974 v1(75.925,38) 76.315,37.61 IC6.N23@76.315,37.584
  Bottom Layer w0.095: v1(75.925,38) 75.925,37.951 75.766,37.792 75.766,35.031 75.536,34.8 75.536,33.843 75.614,33.764 75.648,33.73 75.78,33.598 ccw(c75.884,33.703) 75.988,33.598 76.113,33.723 cw(c76.217,33.619) 76.322,33.723 cw(c76.217,33.619) 76.322,33.515 76.283,33.476 ccw(c76.387,33.372) 76.283,33.268 76.525,33.025 76.806,32.745 76.806,32.5 76.862,32.444 76.894,32.444 77.056,32.282 R71.1@77.056,32.262
SLOT4.LVDSr0_P: IC6.P21 R67.1 | length 8.1
  Top Layer w0.095: IC6.P21@75.516,39.184 v1(75.9,38.8)
  Bottom Layer w0.095: v1(75.9,38.8) 75.5,38.4 75.5,35.141 75.269,34.911 75.269,33.732 75.912,33.089 76.085,33.089 76.539,32.634 76.539,32.5 76.484,32.444 76.452,32.444 76.289,32.282 R67.1@76.289,32.262
SLOT4.LVDSr1_N: IC6.D26 R255.1 | length 8.3
  Top Layer w0.095: IC6.D26@83.515,35.184 83.699,35.001 83.699,34.499 85.484,32.714 85.675,32.714 86.018,32.714 cw(c86.018,32.566) 86.165,32.566 86.165,32.39 ccw(c86.313,32.39) 86.46,32.39 86.46,32.566 cw(c86.608,32.566) 86.755,32.566 86.755,32.39 ccw(c86.903,32.39) 87.05,32.39 87.05,32.566 cw(c87.198,32.566) 87.198,32.714 87.625,32.714 88.73,32.714 88.786,32.658 88.786,32.624 88.948,32.461 R255.1@88.968,32.461
SLOT4.LVDSr1_P: IC6.E24 R253.1 | length 8.8
  Top Layer w0.095: IC6.E24@82.715,36.784 83.067,36.432 83.561,36.432 83.864,36.129 83.864,35.212 83.965,35.111 83.965,34.61 85.595,32.98 88.73,32.98 88.786,33.036 88.786,33.07 88.948,33.233 R253.1@88.968,33.233
SLOT4.LVDSr3_N: IC6.F3 R150.1 | length 9
  Top Layer w0.095: IC6.F3@81.915,53.584 v1(82.315,53.984)
  Bottom Layer w0.095: v1(82.315,53.984) 81.94,53.609 81.94,52.998 81.558,52.616 81.558,51.564 82.189,50.934 83.578,50.934 83.609,50.903 84.141,50.903 84.172,50.934 85.771,50.934 86.276,51.439 86.41,51.439 86.466,51.383 86.466,51.348 86.628,51.186 R150.1@86.648,51.186
SLOT4.LVDSr3_P: IC6.E4 R148.1 | length 8.3
  Top Layer w0.095: IC6.E4@82.715,52.784 v1(83.115,53.184)
  Bottom Layer w0.095: v1(83.115,53.184) 82.74,52.81 82.129,52.81 81.825,52.505 81.825,51.675 82.3,51.2 83.689,51.2 83.72,51.17 84.03,51.17 84.061,51.2 85.661,51.2 86.165,51.705 86.406,51.705 86.462,51.761 86.462,51.797 86.624,51.96 R148.1@86.644,51.96
SLOT5.LVDS_0_N: J29.H3 R260.1 R261.2 | length 133.7
  Top Layer w0.095: R260.1@82.991,30.55 R260.1@82.971,30.55 ; R261.2@83.045,31.297 83.045,31.277 82.882,31.114 82.85,31.114 82.794,31.059 82.794,30.768 82.808,30.754 82.808,30.713 R260.1@82.971,30.55 ; J29.H3@208.139,37.49 208.326,37.49 208.705,37.111 208.705,37.032 208.323,36.65 193.377,36.65 191.861,38.167 177.092,38.167 175.601,36.676 110.58,36.676 107.478,33.575 101.55,33.575 98.125,30.15 95.3,30.15 93.875,28.725 92.075,28.725 91.675,28.325 88.15,28.325 86.333,30.142 82.85,30.142 82.794,30.198 82.794,30.332 82.808,30.346 82.808,30.388 R260.1@82.971,30.55
SLOT5.LVDS_0_P: J29.G3 R259.2 R260.2 | length 134.6
  Top Layer w0.095: R259.2@82.273,31.297 82.273,31.277 82.435,31.114 82.47,31.114 82.527,31.057 82.527,30.768 82.513,30.754 82.513,30.713 R260.2@82.351,30.55 ; R260.2@82.331,30.55 R260.2@82.351,30.55 ; J29.G3@209.539,37.49 209.352,37.49 208.972,37.111 208.972,36.921 208.434,36.383 193.267,36.383 191.75,37.9 177.202,37.9 175.712,36.41 110.69,36.41 107.589,33.308 101.661,33.308 98.236,29.883 95.411,29.883 93.986,28.458 92.186,28.458 91.786,28.058 88.039,28.058 86.223,29.875 82.739,29.875 82.527,30.087 82.527,30.332 82.513,30.346 82.513,30.388 R260.2@82.351,30.55
SLOT5.LVDS_1_N: J29.K3 R277.1 R278.2 | length 126.5
  Layer 1 w0.102: v1(200.475,37.725) 200.475,37.673 200.318,37.516 200.318,37.382 200.938,36.762 202.237,36.762 ; 202.237,36.762 204.204,36.762 204.532,37.09 204.532,37.174 204.472,37.233 204.466,37.233 204.209,37.49 J29.K3@203.939,37.49
  Bottom Layer w0.095: R278.2@83.503,31.318 83.523,31.318 83.686,31.481 83.686,31.515 83.741,31.571 84.024,31.571 84.046,31.549 84.087,31.549 R277.1@84.25,31.386 ; R277.1@84.25,31.366 R277.1@84.25,31.386 ; v1(200.475,37.725) 200.475,37.647 200.345,37.517 200.345,37.272 200.133,37.06 199.321,37.06 199.073,37.308 192.017,37.308 191.4,37.925 189.87,37.925 189.604,37.658 143.583,37.658 142.7,36.775 113.15,36.775 112.225,35.85 96.7,35.85 92.936,32.086 88.764,32.086 88.24,31.563 84.468,31.563 84.454,31.549 84.412,31.549 R277.1@84.25,31.386
SLOT5.LVDS_1_P: J29.J3 R276.2 R277.2 | length 126.8
  Layer 1 w0.102: v1(199.948,37.725) 199.948,37.673 200.105,37.516 200.105,37.293 200.849,36.549 202.237,36.549 ; 202.237,36.548 204.293,36.548 204.746,37.001 204.746,37.174 204.805,37.233 204.812,37.233 205.069,37.49 J29.J3@205.339,37.49
  Bottom Layer w0.095: R276.2@83.505,32.09 83.525,32.09 83.688,31.928 83.688,31.893 83.743,31.837 84.032,31.837 84.038,31.844 84.087,31.844 R277.2@84.25,32.006 ; R277.2@84.25,32.026 R277.2@84.25,32.006 ; v1(199.948,37.725) 199.948,37.647 200.078,37.517 200.078,37.382 200.022,37.327 199.431,37.327 199.183,37.575 192.127,37.575 191.511,38.192 189.76,38.192 189.493,37.925 143.473,37.925 142.589,37.042 113.039,37.042 112.114,36.117 96.589,36.117 92.826,32.353 88.653,32.353 88.13,31.83 84.468,31.83 84.454,31.844 84.412,31.844 R277.2@84.25,32.006
SLOT5.LVDS_2_N: IC6.N25 J29.B1 | length 161.5
  Top Layer w0.095: IC6.N25@76.315,35.984 76.303,35.972 76.303,35.666 75.886,35.25 75.886,34.728 76.708,33.906 76.708,29.264 80.514,25.458 83.54,25.458 86.339,22.658 93.22,22.658 94.715,24.154 94.719,24.154 94.832,24.267 94.992,24.267 v1(95.05,24.325)
  Bottom Layer w0.095: v1(95.05,24.325) 95.05,24.408 95.185,24.543 95.185,25.222 100.072,30.108 195.458,30.108 195.975,30.625 197.377,30.625 199.086,32.333 218.361,32.333 219.142,33.115 219.142,33.811 218.336,34.617 217.362,34.617 217.105,34.361 217.105,34.057 J29.B1@216.539,33.49
SLOT5.LVDS_2_P: IC6.N26 J29.A1 | length 160.9
  Top Layer w0.095: IC6.N26@76.315,35.184 76.315,35.163 76.153,35.001 76.153,34.839 76.975,34.017 76.975,29.375 80.625,25.725 83.65,25.725 86.45,22.925 93.109,22.925 94.505,24.321 94.505,24.47 v1(94.564,24.528)
  Bottom Layer w0.095: v1(94.564,24.528) 94.622,24.587 94.782,24.587 94.919,24.723 94.919,25.332 99.962,30.375 195.348,30.375 195.864,30.892 197.267,30.892 198.975,32.6 200.25,32.6 200.298,32.6 ccw(c200.298,32.748) 200.445,32.748 200.445,32.866 cw(c200.593,32.866) 200.74,32.866 200.74,32.748 ccw(c200.888,32.748) 201.035,32.748 201.035,32.924 cw(c201.183,32.924) 201.33,32.924 201.33,32.748 ccw(c201.478,32.748) 201.625,32.748 201.625,32.924 cw(c201.773,32.924) 201.92,32.924 201.92,32.748 ccw(c202.068,32.748) 202.068,32.6 202.425,32.6 218.25,32.6 218.875,33.225 218.875,33.7 218.225,34.35 217.472,34.35 217.372,34.25 217.372,34.057 J29.A1@217.939,33.49 J29.A1@217.752,33.49
SLOT5.LVDS_3_N: J29.B7 R152.1 R153.2 | length 142
  Bottom Layer w0.095: R153.2@86.903,53.393 86.923,53.393 87.085,53.23 87.085,53.216 87.141,53.16 87.487,53.16 87.501,53.174 87.543,53.174 R152.1@87.705,53.337 ; R152.1@87.705,53.357 R152.1@87.705,53.337 ; J29.B7@216.539,45.49 216.726,45.49 217.105,45.111 217.105,45.032 216.648,44.575 201.275,44.575 199.958,45.892 196.908,45.892 193.733,49.067 153.514,49.067 152.598,48.15 139.998,48.15 137.289,45.442 106.514,45.442 105.239,44.167 93.958,44.167 91.675,46.45 91.675,51.427 89.942,53.16 87.924,53.16 87.909,53.174 87.868,53.174 R152.1@87.705,53.337
SLOT5.LVDS_3_P: J29.A7 R151.2 R152.2 | length 142.4
  Bottom Layer w0.095: R151.2@86.899,52.656 86.919,52.656 87.081,52.819 87.081,52.835 87.14,52.893 87.487,52.893 87.501,52.879 87.543,52.879 R152.2@87.705,52.717 ; R152.2@87.705,52.697 R152.2@87.705,52.717 ; J29.A7@217.939,45.49 217.752,45.49 217.372,45.111 217.372,44.921 216.759,44.308 201.164,44.308 199.848,45.625 196.798,45.625 193.623,48.8 153.625,48.8 152.708,47.883 140.108,47.883 137.4,45.175 106.625,45.175 105.35,43.9 93.848,43.9 91.408,46.339 91.408,51.317 89.832,52.893 87.924,52.893 87.909,52.879 87.868,52.879 R152.2@87.705,52.717
SLOT5.LVDS_4_N: IC6.E26 J29.E7 | length 139.4
  Top Layer w0.095: IC6.E26@82.715,35.184 82.899,35.001 82.899,34.099 85.248,31.75 91.502,31.75 98.736,38.983 105.611,38.983 107.961,41.333 172.633,41.333 173.85,42.55 186.552,42.55 188.561,44.558 194.249,44.558 194.511,44.82 194.695,44.82 v1(194.75,44.875)
  Int2 (Sign) w0.102: v1(194.75,44.875) 194.787,44.912 194.787,45.133 195.298,45.645 200.57,45.645 201.35,46.425 212.433,46.425 212.932,45.926 212.932,45.842 212.58,45.49 J29.E7@212.339,45.49
SLOT5.LVDS_4_P: IC6.D25 J29.D7 | length 140.2
  Top Layer w0.095: IC6.D25@83.515,35.984 83.127,35.596 83.127,35.15 83.165,35.111 83.165,34.21 85.358,32.017 91.392,32.017 98.625,39.25 105.5,39.25 107.85,41.6 172.523,41.6 173.74,42.817 186.442,42.817 188.45,44.825 194.139,44.825 194.322,45.008 194.322,45.192 v1(194.377,45.248)
  Int2 (Sign) w0.102: v1(194.377,45.248) 194.414,45.285 194.636,45.285 195.21,45.858 200.481,45.858 201.261,46.639 212.522,46.639 213.146,46.015 213.146,45.842 213.498,45.49 J29.D7@213.739,45.49
SLOT5.LVDS_5_N: IC6.J3 J12.H5 | length 138.9
  Top Layer w0.095: IC6.J3@79.515,53.584 79.563,53.632 79.823,53.632 80.225,54.034 80.46,54.034 81,54.575 81,55.877 81.6,56.478 81.6,56.75 82.253,57.403 82.253,57.792 82.123,57.922 v1(82.123,58)
  Bottom Layer w0.095: v1(82.123,58) 82.123,58.078 82.253,58.208 82.253,60.08 84.04,61.867 91.658,61.867 92.433,61.092 93.483,61.092 94.158,60.417 105.936,60.417 106.636,59.717 112.014,59.717 112.586,60.289 120.523,60.289 121.386,60.289 121.814,60.716 122.559,60.716 123.025,60.25 139.448,60.25 140.573,61.375 199.836,61.375 200.486,60.725 201.124,60.725 202.083,59.765 202.76,59.765 202.875,59.65 208.323,59.65 208.705,60.032 208.705,60.111 208.326,60.49 J12.H5@208.139,60.49
SLOT5.LVDS_5_P: IC6.H3 J12.G5 | length 138.5
  Top Layer w0.095: IC6.H3@80.315,53.474 IC6.H3@80.315,53.584 ; IC6.H3@80.315,53.584 80.498,53.768 80.57,53.768 81.267,54.464 81.267,55.767 81.867,56.367 81.867,56.64 82.52,57.293 82.52,57.792 82.65,57.922 v1(82.65,58)
  Bottom Layer w0.095: v1(82.65,58) 82.65,58.078 82.52,58.208 82.52,59.97 84.15,61.6 91.548,61.6 92.323,60.825 93.373,60.825 94.048,60.15 105.825,60.15 106.525,59.45 112.125,59.45 112.697,60.022 120.412,60.022 121.497,60.022 121.925,60.45 122.448,60.45 122.915,59.983 139.558,59.983 140.683,61.108 199.725,61.108 200.375,60.458 201.013,60.458 201.973,59.499 202.649,59.499 202.764,59.383 208.434,59.383 208.972,59.921 208.972,60.111 209.352,60.49 J12.G5@209.539,60.49
SLOT5.LVDS_6_N: IC6.P5 J12.K5 | length 139.7
  Top Layer w0.095: v1(75.124,52.375) IC6.P5@75.515,51.984
  Layer 1 w0.102: v1(75.124,52.375) 75.174,52.425 75.174,52.621 75.234,52.681 75.406,52.681 75.691,52.965 75.691,53.225 75.925,53.459 75.925,55.05 79.975,59.1 81.353,59.1 82.564,60.311 89.964,60.311 90.814,59.461 92.495,59.461 93.045,60.011 93.045,60.241 93.202,60.398 v1(93.202,60.45) ; v1(200.869,59.97) 200.869,59.944 201.08,59.733 201.243,59.733 201.351,59.625 204.103,59.625 204.532,60.054 204.532,60.138 204.18,60.49 J12.K5@203.939,60.49
  Bottom Layer w0.095: v1(93.202,60.45) 93.202,60.372 93.072,60.242 93.072,59.878 93.608,59.342 104.185,59.342 104.209,59.366 104.741,59.366 104.765,59.342 105.461,59.342 106.556,58.247 113.647,58.247 114.242,58.842 122.894,58.842 123.32,59.268 124.463,59.268 124.534,59.197 125.365,59.197 125.593,59.425 126.775,59.425 127.4,58.8 139.673,58.8 141.148,60.275 199,60.275 199.494,59.781 200.661,59.781 200.85,59.97 v1(200.869,59.97)